# Altium PCB OSHChip_CMSIS_DAP_V1.0.PcbDoc
Units mil, origin at the board's own origin, x right, y up, seen from the top; angles counter-clockwise.
Board outline 1500 x 750 mil, 2 copper layers (Top Layer, Bottom Layer); 34 components, 42 nets, 120 pads, 41 vias.
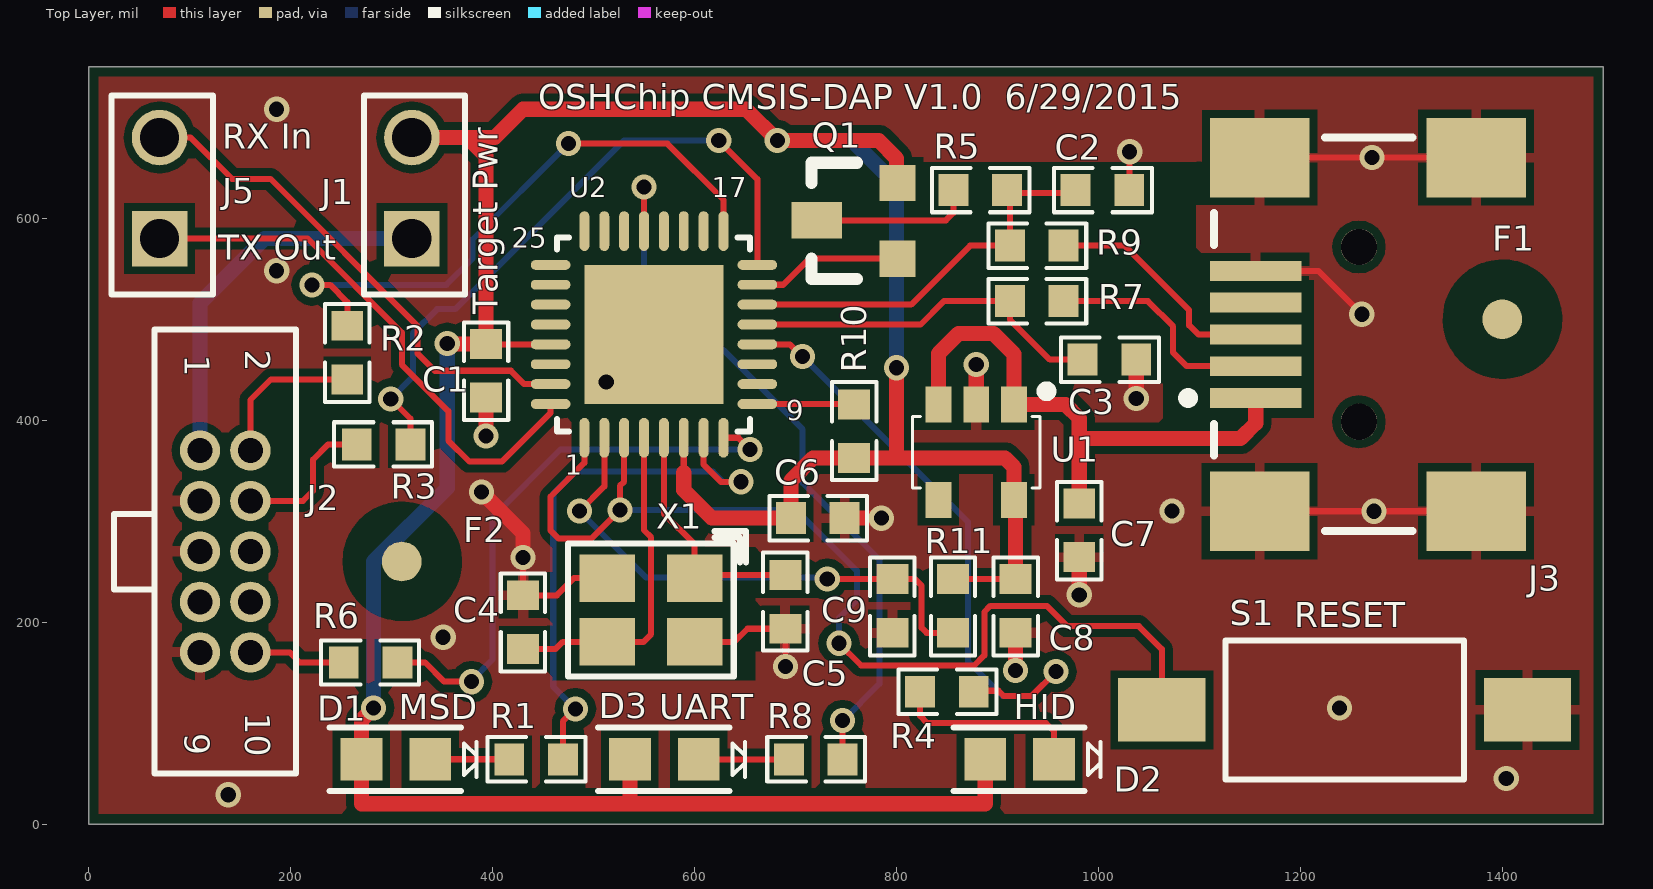
[diagram p0: Top Layer view]
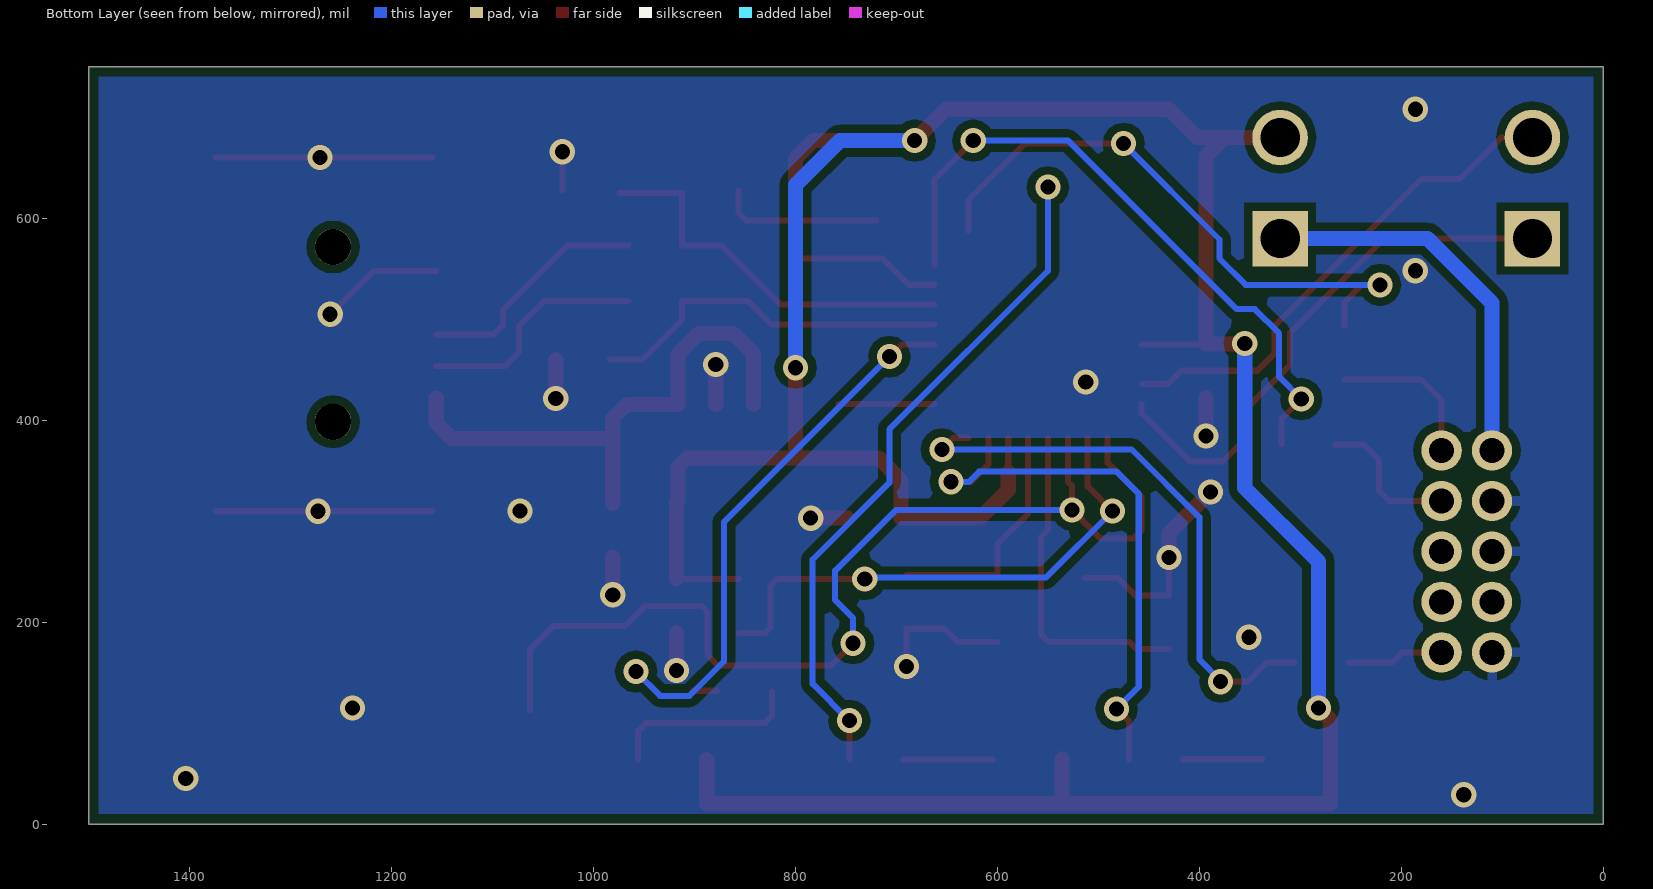
[diagram p1: Bottom Layer view, seen from below]
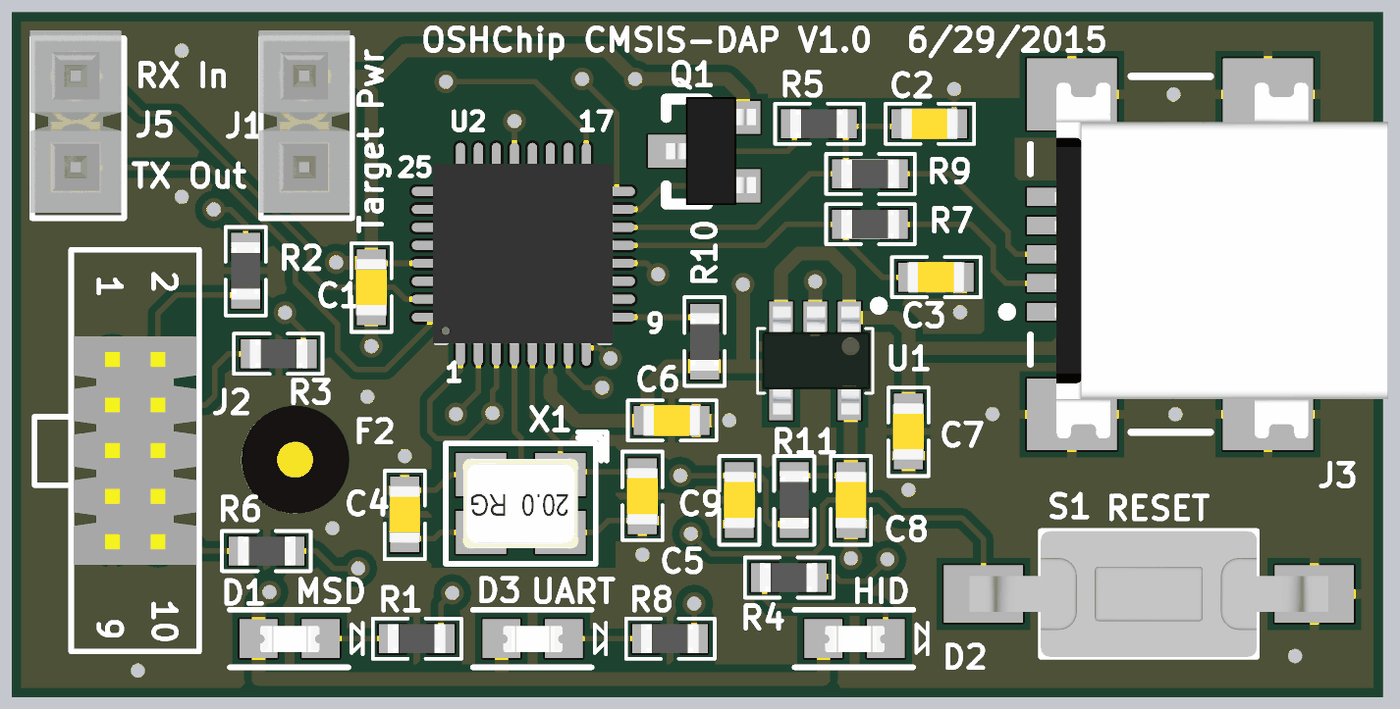
[diagram p2: 3D render of the assembled board from above, using the file's embedded part models]

## Layer stack, top to bottom
Top Layer: signal copper 1.4
Dielectric: dielectric 12.6, FR-4, Dk 4.8
Bottom Layer: signal copper 1.4

## Board outline
0,0 1500,0 1500,750 0,750

## Design rules (kind name [scope] priority, off if disabled: settings)
Clearance Polygon [(InNamedPolygon('Top_3.3V')) or (InNamedPolygon('Bottom_GND')) or (InNamedPolygon('Mid_Layer_1-GND')) or (InNamedPolygon('Mid_Layer_2-GND'))] p1: gap=8
Clearance [All] p2: gap=6.1
ComponentClearance [All] p1 off: gap=10 collisioncheckmode=3 verticalgap=10 showdistances=FALSE
FabricationTestPointUsage TestPointUsage [All] p1: valid=0 allowmultiple=FALSE
FabricationTestpoint Testpoint [All] p1: side=3 testpointundercomponent=TRUE minsize=40 maxsize=100 preferedsize=60 minholesize=0 maxholesize=40 preferedholesize=32 testpointgrid=1 allowsidetop=TRUE allowsidebottom=TRUE usegrid=TRUE gridtolerance=0.01
Height [All] p1 off: minheight=0 maxheight=1000 prefheight=500
HoleSize [All] p1: absolutevalues=TRUE maxlimit=160 minlimit=10 maxpercent=80.000 minpercent=20.000
HoleToHoleClearance [All] p1 off: gap=3 allowstackedmicrovias=FALSE
MinimumAnnularRing [All] p1 off: minimumring=5
MinimumSolderMaskSliver [All] p1: minsoldermaskwidth=3
PolygonConnect PolygonConnect_GND_Vias [isVia and innet(gnd)] p1: connectstyle=Direct reliefconductorwidth=10 reliefentries=4 polygonreliefangle="90 Angle"
PolygonConnect [All] p2: connectstyle=Relief reliefconductorwidth=10 reliefentries=4 polygonreliefangle="90 Angle"
RoutingCorners [All] p1: cornerstyle=45-Degree minsetback=20 maxsetback=20
RoutingVias [All] p1: holewidth=15 width=25 viastyle="Through Hole" minholewidth=15 minwidth=25 maxholewidth=100 maxwidth=120
SilkToSilkClearance [All] p1: silktosilkclearance=0
SilkscreenOverComponentPads [IsPad] p1: minsilkscreentomaskgap=3
SolderMaskExpansion [All] p1: expansion=2
Width [All] p1: maxlimit=100 minlimit=5 preferedwidth=6
18 further rules are at their usual default settings.

## Components (designator, comment, footprint, x,y, rotation, side; value= is the part's Value field where it differs from the comment)
C1 "0.1 uF 0603" "0603 Cap" 393.43,449 r90 top
C2 "18 pF 0603" "0603 Cap" 1004,628 r180 top
C3 "18 pF 0603" "0603 Cap" 1011,460 r180 top
C4 "18 pF 0603" "0603 Cap" 430,200 r90 top
C5 "18 pF 0603" "0603 Cap" 690,220 r270 top
C6 "0.1 uF 0603" "0603 Cap" 722,303 r180 top
C7 "1.0 uF 6.3V 0603" "0603 Cap" 981,291 r90 top
C8 "10uF 6.3V 0603" "0603 Cap" 918,216 r90 top
C9 "0.1 uF 0603" "0603 Cap" 796,216 r90 top
D1 "LED China Green 0603" 0603_LED 304,64 r0 top
D2 "LED China Green 0603" 0603_LED 922,64 r0 top
D3 "LED China Green 0603" 0603_LED 570,64 r0 top
F1 "F Fiducial" "FIDUCIAL DOT" 1400,500 r0 top
F2 "F Fiducial" "Fiducial Dot" 310,260 r0 top
J1 "HDR 1X2 0.1\"" HDR_2X1_2MM54 320,630 r180 top
J2 "2 x 5 SWD HDR" "HDR_2X5_1.27MM-THROUGH_HOLE_SWD NO SHROUD" 135,270 r270 top
J3 "Mini-B USB" USB_MINI-B 1265,485 r90 top
J5 "HDR 1X2 0.1\"" HDR_2X1_2MM54 70,630 r180 top
Q1 "BSS84 SOT-23" SOT23-123 761,598 r90 top
R1 "470R 0603" "0603 Res" 443,64 r180 top
R2 "470R 0603" "0603 Res" 256,467 r90 top
R3 "470R 0603" "0603 Res" 292,376 r0 top
R4 "470R 0603" "0603 Res" 850,131 r180 top
R5 "1.5K 0603" "0603 Res" 883,628 r180 top
R6 "470R 0603" "0603 Res" 279,160 r0 top
R7 "33R  0603" "0603 Res" 939,518 r180 top
R8 "470R 0603" "0603 Res" 720,64 r180 top
R9 "33R  0603" "0603 Res" 939,573 r180 top
R10 "10K  0603" "0603 Res" 758,389 r270 top
R11 "10K  0603" "0603 Res" 856,216 r90 top
S1 "Tact Switch FSMSM" "FSMSM Tact Switch" 1244,113 r180 top
U1 "TC1014-3.3VCT713" SOT23-5AL 879,368.29 r270 top
U2 "LPC11U35FHI33/501" "LPC11U35 QFN32 FOOTPRINT" 559.76,485 r90 top
X1 "12.000 MHz 2.5mmx3.2mm" "NX3225SA - High Density" 556.78,212 r180 top

## Footprints (in the part's own frame and the unit in brackets; to place one, negate y for a bottom-side part, rotate by r counter-clockwise, add the part's x,y. Pads: shape width x height; smd on the part's side, far side on the other; paste and mask are expansions set on the pad)
"0603 Cap" [mm] "Cap 0603  1608mm"
  rect 0.75x0.8 smd: 1(-0.675,0) 2(0.675,0)
  silkscreen extent -1.24,-0.56 1.22,0.56, body extent -0.8,-0.43 0.8,0.43, height 0.8
"0603 Res" [mm] "Res 0603  1608mm"
  rect 0.75x0.8 smd: 1(-0.675,0) 2(0.675,0)
  silkscreen extent -1.24,-0.56 1.22,0.56, body extent -0.8,-0.4 0.8,0.4, height 0.37
0603_LED [mm] "0603_LED_15/02/2007"
  rect 1.05x1.08 smd: 1(-0.865,0.004) 2(0.865,0.004)
  silkscreen extent -1.67,-0.8 2.03,0.8, body extent -0.82,-0.37 0.83,0.35, height 0.68
"FIDUCIAL DOT" [mm] "Fiducial Dot 1mm dia copper, no paste, mask 3mm dia"
  round 1 smd paste-0.533 mask+1: 0(0,0)
  Top Layer pour cut-out: -0.089,1.5 -0.003,1.503 0.084,1.501 0.187,1.492 0.238,1.485 0.287,1.476 0.388,1.454 0.491,1.423 0.582,1.388 0.626,1.369 0.668,1.349 0.759,1.301 0.846,1.247 0.898,1.21 0.948,1.171 1.024,1.107 1.101,1.032 1.176,0.943 1.253,0.841 1.307,0.755 1.354,0.663 1.381,0.607 1.403,0.555 1.429,0.482 1.454,0.407 1.468,0.345 1.481,0.282 1.491,0.227 1.498,0.174 1.507,0.079 1.508,-0.015 1.502,-0.129 1.494,-0.203 1.481,-0.277 1.465,-0.354 1.429,-0.479 1.395,-0.569 1.354,-0.658 1.312,-0.738 1.253,-0.835 1.176,-0.937 1.113,-1.012 1.062,-1.064 1.018,-1.107 0.97,-1.148 0.909,-1.196 0.846,-1.242 0.759,-1.296 0.668,-1.343 0.599,-1.376 0.489,-1.417 0.389,-1.447 0.285,-1.472 0.203,-1.485 0.109,-1.494 0.011,-1.496 -0.068,-1.496 -0.172,-1.485 -0.271,-1.47 -0.371,-1.448 -0.475,-1.42 -0.566,-1.384 -0.652,-1.343 -0.744,-1.295 -0.83,-1.242 -0.932,-1.166 -0.984,-1.124 -1.06,-1.051 -1.133,-0.971 -1.187,-0.904 -1.237,-0.835 -1.313,-0.708 -1.364,-0.607 -1.414,-0.48 -1.465,-0.277 -1.491,-0.048 -1.474,0.232 -1.46,0.31 -1.451,0.349 -1.442,0.387 -1.416,0.475 -1.401,0.517 -1.384,0.56 -1.353,0.633 -1.319,0.703 -1.291,0.753 -1.264,0.797 -1.236,0.841 -1.2,0.893 -1.161,0.943 -1.11,1.003 -1.056,1.061 -0.996,1.118 -0.932,1.171 -0.878,1.213 -0.822,1.253 -0.764,1.289 -0.703,1.324 -0.617,1.366 -0.528,1.404 -0.466,1.426 -0.402,1.446 -0.337,1.463 -0.271,1.476 -0.185,1.491
"Fiducial Dot" [mm] "Fiducial Dot 1mm dia copper, no paste, mask 3mm dia"
  round 1 smd paste-0.533 mask+1: 0(0,0)
  Top Layer pour cut-out: -0.089,1.5 -0.003,1.503 0.084,1.501 0.187,1.492 0.238,1.485 0.287,1.476 0.388,1.454 0.491,1.423 0.582,1.388 0.626,1.369 0.668,1.349 0.759,1.301 0.846,1.247 0.898,1.21 0.948,1.171 1.024,1.107 1.101,1.032 1.176,0.943 1.253,0.841 1.307,0.755 1.354,0.663 1.381,0.607 1.403,0.555 1.429,0.482 1.454,0.407 1.468,0.345 1.481,0.282 1.491,0.227 1.498,0.174 1.507,0.079 1.508,-0.015 1.502,-0.129 1.494,-0.203 1.481,-0.277 1.465,-0.354 1.429,-0.479 1.395,-0.569 1.354,-0.658 1.312,-0.738 1.253,-0.835 1.176,-0.937 1.113,-1.012 1.062,-1.064 1.018,-1.107 0.97,-1.148 0.909,-1.196 0.846,-1.242 0.759,-1.296 0.668,-1.343 0.599,-1.376 0.489,-1.417 0.389,-1.447 0.285,-1.472 0.203,-1.485 0.109,-1.494 0.011,-1.496 -0.068,-1.496 -0.172,-1.485 -0.271,-1.47 -0.371,-1.448 -0.475,-1.42 -0.566,-1.384 -0.652,-1.343 -0.744,-1.295 -0.83,-1.242 -0.932,-1.166 -0.984,-1.124 -1.06,-1.051 -1.133,-0.971 -1.187,-0.904 -1.237,-0.835 -1.313,-0.708 -1.364,-0.607 -1.414,-0.48 -1.465,-0.277 -1.491,-0.048 -1.474,0.232 -1.46,0.31 -1.451,0.349 -1.442,0.387 -1.416,0.475 -1.401,0.517 -1.384,0.56 -1.353,0.633 -1.319,0.703 -1.291,0.753 -1.264,0.797 -1.236,0.841 -1.2,0.893 -1.161,0.943 -1.11,1.003 -1.056,1.061 -0.996,1.118 -0.932,1.171 -0.878,1.213 -0.822,1.253 -0.764,1.289 -0.703,1.324 -0.617,1.366 -0.528,1.404 -0.466,1.426 -0.402,1.446 -0.337,1.463 -0.271,1.476 -0.185,1.491
"FSMSM Tact Switch" [mm] "FSMSM Tact Switch 6 x 3.5 mm, SMD"
  rect 2.2x1.6 smd: 1(-4.6,0) 2(4.6,0)
  silkscreen extent -3,-1.75 3,1.75, body extent -4.98,-1.75 4.98,1.75, height 4.4
HDR_2X1_2MM54 [mil] "HDR_2X1_2MM54_15/02/2007"
  rect 55x55 hole 39: 1(0,50)
  round 55 hole 39: 2(0,-50)
  silkscreen extent -52,-92 48,105, body extent -50,-100 50,100, height 330
"HDR_2X5_1.27MM-THROUGH_HOLE_SWD NO SHROUD" [mil] "1.27mm Through_Hole, FTSH 102 series, \"SWD\" version J-LINK Lite, No shroud"
  round 40 hole 25: 1(-100,-25) 2(-100,25) 3(-50,-25) 4(-50,25) 5(0,-25) 6(0,25) 7(50,-25) 8(50,25) 9(100,-25) 10(100,25)
  silkscreen extent -220,-70 220,70, body extent -125,-68 125,68, height 219
"LPC11U35 QFN32 FOOTPRINT" [mm] "QFN, 32-Leads, Body 5.0x5.0mm (max), Pitch 0.50mm, IPC Low Density"
  oval 1x0.25 smd mask+0.075: 1(-2.6,1.75) 2(-2.6,1.25) 3(-2.6,0.75) 4(-2.6,0.25) 5(-2.6,-0.25) 6(-2.6,-0.75) 7(-2.6,-1.25) 8(-2.6,-1.75) 17(2.6,-1.75) 18(2.6,-1.25) 19(2.6,-0.75) 20(2.6,-0.25) 21(2.6,0.25) 22(2.6,0.75) 23(2.6,1.25) 24(2.6,1.75)
  oval 0.25x1 smd mask+0.075: 9(-1.75,-2.6) 10(-1.25,-2.6) 11(-0.75,-2.6) 12(-0.25,-2.6) 13(0.25,-2.6) 14(0.75,-2.6) 15(1.25,-2.6) 16(1.75,-2.6) 25(1.75,2.6) 26(1.25,2.6) 27(0.75,2.6) 28(0.25,2.6) 29(-0.25,2.6) 30(-0.75,2.6) 31(-1.25,2.6) 32(-1.75,2.6)
  rect 3.5x3.5 smd paste-2: 33(0,0)
  silkscreen extent -2.44,-2.41 2.44,2.44, body extent -2.5,-2.5 2.52,2.52, height 0.8
"NX3225SA - High Density" [mm] "NDK NX3225SA SMT crystals"
  rect 1.4x1.2 smd: 1(-1.1,-0.8) 2(1.1,-0.8) 3(1.1,0.8) 4(-1.1,0.8)
  silkscreen extent -2.39,-1.98 2.08,1.68, body extent -1.61,-1.25 1.61,1.25, height 0.83
SOT23-5AL [mm] "SOT23, 5-Leads, Body 2.9x1.6mm, Pitch 0.95mm, Lead Span 2.8mm, IPC High Density"
  rect 0.9x0.65 smd: 1(-1.2,0.95) 2(-1.2,0) 3(-1.2,-0.95) 4(1.2,-0.95) 5(1.2,0.95)
  silkscreen extent -1.66,-1.6 0.9,1.89, body extent -1.51,-1.47 1.49,1.53, height 1.3
SOT23-123 [mil]
  rect 36x36 smd: 1(-38,-40) 2(37,-40)
  rect 36x50 smd: 3(0,40)
  silkscreen extent -58,0 57,45, body extent -59,-53 59,45, height 43
USB_MINI-B [mm] "Connector; USB2.0, Type B, SM; 5 Position; Right Angle"
  rect 0.5x2.3 smd: 1(-1.6,2.774) 2(-0.8,2.774) 3(0,2.774) 4(0.8,2.774) 5(1.6,2.774)
  rect 2x2.5 smd: Case(-4.45,-2.776) Case(-4.45,2.674) Case(4.45,-2.776) Case(4.45,2.674)
  round 0.914 hole 0.914 unplated: MH1(2.2,0.174) MH2(-2.2,0.174)
  silkscreen extent -4.95,-1.18 4.95,4.6, body extent -5.13,-6.1 4.78,3.15, height 3.93

## Part data
C1 C6 C9: library part "C 0.1 uF 16V 10% X7R 0603", "0.1 uF 16V 10% X7R 0603"
C2 C3 C4 C5: library part "C 18 pF 0603  50V  NP0  5%", "Capacitor 18 pF 0603  50V  NP0  5%"
C7: library part "C 1.0 uF 6.3V 10% X7R 0603", "Capacitor 1.0 uF 6.3V 10% X7R 0603"
C8: library part "C 10uF 0603 6.3V 20% X5R", "Capacitor 10uF 0603 6.3V 20% X5R"
D1 D2 D3: library part "D LED LED_China_Green_0603", "LED Green 0603"
F1 F2: "Fiducial"
J1 J5: library part "J Header 1X2, 2.54 mm pitch", "Header 1X2, 2.54 mm pitch"
J2: library part "J Header 5X2 J-Link Lite   FTSH-105-01-L-D through hole, No Key, No shroud", "FTSH-105-01-L-D through hole, No Key, No shroud"
J3: library part "J Mini-B USB 690-005-299-043 With alignment pins", "USB 2.0, Right Angle, SMT, B Type, Receptacle, 5 Position, Black"
Q1: library part "Q BSS84", "P-channel Enhancement Mode Vertical D-MOSFET"
R1 R2 R3 R4 R6 R8: library part "R 470R 0603 1/10 W 1%", "Resistor 470R 0603 1/10 W 1%"
R5: library part "R 1.5K 0603 1/10 W 1%", "Resistor 1.5K 0402 1/10 W 1%"
R7 R9: library part "R 33R 0603 1/10 W 1%", "Resistor 33R 0603 1/10 W 1%"
R10 R11: library part "R 10K 0603 1/10 W 1%", "Resistor 10K 0603 1/10 W 1%"
S1: library part "S FSMSM 6 x 3.5 mm   Tact Switch", "6 x 3.5 mm   Tact Switch"
U1: library part "U TC1014-3.3VCT713", "3.3V 50mA LDO"
U2: "LPC11U35FHI33/501 ARM M0 64KB FLASH 33HVQFN"
X1: library part "X 12MHz, 2.5mmx3.2mm 30ppm 8 pF", "12MHz"

## Via types
v1: diameter 25, hole 15, Top Layer to Bottom Layer, tented both sides, 41 vias

## Nets (pads, with @x,y where several pads share a name; then routed paths per layer and width w, separated by ;. In a path a pad name is that pad's centre, name@x,y a point inside that pad or via, vN(x,y) a via of type N, cw(c..) or ccw(c..) an arc to the next point about the centre after c; other vN are vias at no path point)
3.3V: C1.2 C6.2 C8.2 D1.1 D2.1 D3.1 J1.2 Q1.2 R10.2 R11.2 U1.5 U2.6 U2.29 | length 3066.3
  Top Layer w6: C1.2@393.84,475.16 U2.29 ; 589.29,348 U2.6 ; R11.2 C8.2
  Top Layer w15: v1(282,115) 269.93,102.93 D1.1 270,64.08 270,20 535.93,20 ; J1.2 375,680 ; v1@355,475.57 C1.2 393.43,661.57 375,680 ; D3.1 535.93,20 ; 589.29,348 589.29,330.71 617,303 C6.2 695.43,340.43 717.43,362.43 R10.2 800,362.43 ; v1(800,452.02) 800,362.43 ; Q1.2@800,635 800,659.41 782.41,677 v1(682,677) 651,708 430,708 402,680 375,680 ; 888,20 535.93,20 ; 888,20.21 D2.1@888,64 ; U1.5 916.4,353.6 907.57,362.43 800,362.43 ; C8.2 U1.5@918,319.45
  Bottom Layer w15: v1(282,115) 282,260 355,333 v1(355,476) ; v1(682,677) 756,677 800,633 v1(800,452.02)
GND: C1.1 C2.1 C3.1 C4.2 C5.2 C6.1 C7.1 C8.1 C9.1 J2.3 J2.5 J2.9 J3.5 J3.Case S1.1 U1.2 U2.33 X1.2 X1.4 | length 1160.6
  Top Layer w6: v1(430,264) C4.2 463.57,226.57 480.5,243.5 X1.2 ; X1.4 639.5,180.5 652.43,193.43 C5.2 v1(690,156) ; C2.1@1031,627.57 v1(1031,666) ; J3.5@1155.94,547.99 1218.01,547.99 v1(1261,505) ; J3.Case@1159.88,309.8 v1(1273,309.8) J3.Case@1374.45,309.8 ; J3.Case@1159.88,660.2 v1(1271,660.2) J3.Case@1374.45,660.2
  Top Layer w15: v1(389,329) 430,288 v1(430,264) ; v1(393.43,384.43) C1.1 ; C6.1 v1(785,303) ; U1.2 v1(879,455.29) ; v1(918,152) C8.1 ; v1(981,227) C7.1 ; v1(1037.57,421.43) C3.1
  other v1: 138,29 1404,45 1239,115 350.95,185 1073,310 512.52,437.75 186,548 186,708
IF_RESET: C9.2 R11.1 U2.2 | length 526.6
  Top Layer w6: v1(486,310) 510.55,334.55 U2.2 ; v1(731.43,242.57) C9.2 818.54,242.57 825,236.11 825,194.43 830,189.43 R11.1
  Bottom Layer w6: v1(486,310) 552,244 v1@731.43,244
LED_HID: R4.1 U2.12 | length 623.3
  Top Layer w6: U2.12 694.44,475.16 706.6,463 v1(707,463) ; R4.1@877.57,132 901,132 906,127 934,127 v1(958,151)
  Bottom Layer w6: v1(707,463) 871,299 871,161 905,127 934,127 v1(958,151)
LED_MSD: R1.1 U2.7 | length 547.2
  Top Layer w6: R1.1 469.57,101.57 v1(482,114) ; U2.7 608.98,356.02 626,339 v1(646,339)
  Bottom Layer w6: v1(482,114) 460,136 460,327 482,349 618,349 628,339 v1(646,339)
LED_UART: R8.1 U2.21 | length 722.1
  Top Layer w6: U2.21 v1(549.92,630.92) ; R8.1 v1(746.57,102.43)
  Bottom Layer w6: v1(549.92,630.92) 549.92,548.08 707,391 707,338 783,262 783,138.85 v1(746.57,102.43)
NetC4_1: C4.1 U2.4 X1.3 | length 330.6
  Top Layer w6: C4.1 462.43,173.43 469.5,180.5 X1.3 549.5,180.5 557,188 557,284 549.92,291.08 U2.4
NetC5_1: C5.1 U2.5 X1.1 | length 243
  Top Layer w6: U2.5 569.61,307.39 600.08,276.92 X1.1 603.16,246.57 C5.1
NetD1_2: D1.2 R1.2 | length 78.2
  Top Layer w6: D1.2 R1.2@416.28,64.15
NetD2_2: D2.2 R4.2 | length 190.6
  Top Layer w6: R4.2 823.43,107.15 830.57,100 948,100 956.04,91.96 D2.2
NetD3_2: D3.2 R8.2 | length 89.2
  Top Layer w6: D3.2@604.19,64 R8.2
NetJ1_1: J1.1 J2.1 | length 382.5
  Bottom Layer w15: J2.1 110,516 174,580 J1.1
NetJ2_2: J2.2 R2.1 | length 154.5
  Top Layer w6: J2.2 160,420 180.43,440.43 R2.1
NetJ2_4: J2.4 R3.1 | length 146.8
  Top Layer w6: J2.4 212,320 222,330 222,361 237,376 R3.1
NetJ2_10: J2.10 R6.1 | length 96.6
  Top Layer w6: J2.10 199,170 209,160 R6.1
NetJ3_2: J3.2 R7.1 | length 232.3
  Top Layer w6: R7.1 1049,518 1074,493 1074,467 1087.5,453.5 J3.2@1155.94,453.5
NetJ3_3: J3.3 R9.1 | length 235.6
  Top Layer w6: R9.1 1026,573 1090,509 1090,494 1099,485 J3.3@1155.94,485
NetQ1_3: Q1.3 R5.2 | length 162.1
  Top Layer w6: Q1.3@720,598 849,598 856.43,605.43 R5.2
PIO0_4: U2.10
PIO0_5: U2.11
PIO0_9: U2.18
PIO0_10: U2.19
PIO0_12: U2.22
PIO0_13: U2.23
PIO0_14: U2.24
PIO0_15: U2.25
PIO0_16: U2.26
PIO0_17: U2.30
PIO0_22: U2.20
PIO0_23: U2.27
PIO1_15: U2.28
RESET: S1.2 U2.1 U2.3 | length 1057.9
  Top Layer w6: U2.1 490.87,357.87 457.4,324.4 457.4,290.6 465,283 498,283 v1(526,311) 526,335 530.24,339.24 U2.3 ; v1(743,179) 765,157 877,157 887,167 887,210 893,216 949,216 969,196 1040,196 1062.9,173.1 S1.2
  Bottom Layer w6: v1(526,311) 700.57,311 760.69,250.88 760.69,221.69 743,204 v1(743,179)
RX_IN: J5.2 U2.31 | length 504.5
  Top Layer w6: J5.2 100.86,680 141.94,638.92 180,638.92 325.72,493.2 325.72,466 342.72,449 418,449 431.21,435.79 U2.31
TGT_NRESET: R6.2 U2.8 | length 566.6
  Top Layer w6: R6.2 333,160 352,141 v1(379,141) ; U2.8 643.36,382.64 v1(655,371)
  Bottom Layer w6: v1@378.5,141.5 400,163 400,304 467,371 v1(655,371)
TGT_SWCLK: R3.2 U2.16 | length 648.2
  Top Layer w6: v1(299,421) 318.57,401.43 R3.2 ; v1(624,677) 662.13,638.87 U2.16
  Bottom Layer w6: v1(299,421) 321,443 321,486 345,510 363,510 530,677 v1(624,677)
TGT_SWDIO: R2.2 U2.17 | length 596.3
  Top Layer w6: v1(221,534) 239,534 256,517 R2.2 ; v1(475,674) 573,674 628.66,618.34 U2.17
  Bottom Layer w6: v1(221,534) 354,534 380,560 380,579 v1(475,674)
TX_OUT: J5.1 U2.32 | length 543.3
  Top Layer w6: J5.1 216.72,580 310,486.72 310,455.14 356.15,408.99 356.15,379.85 377,359 409,359 457.4,407.4 U2.32
USB_D_N: C3.2 R7.2 U2.13 | length 366.7
  Top Layer w6: U2.13 823.84,494.84 847,518 R7.2 912.43,499.57 952,460 C3.2
USB_D_P: C2.2 R5.1 R9.2 U2.14 | length 388.8
  Top Layer w6: U2.14 814.53,514.53 873,573 R9.2 912.43,625.15 C2.2@974.57,625.15
USB_SCON: Q1.1 U2.15 | length 148.6
  Top Layer w6: U2.15 687.64,534.21 713.43,560 Q1.1@800,560
V_USB: C7.2 J3.1 U1.1 U1.3 | length 552.8
  Top Layer w15: U1.3 841.6,466 861.6,486 896,486 916.4,465.6 U1.1 967.47,415.54 981,402 C7.2 ; 981,382 1140.88,382 1155.94,397.06 J3.1@1155.94,422.01
VBUS_SENSE: R10.1 U2.9 | length 95.3
  Top Layer w6: U2.9 R10.1@757.47,416.1
pads on no net: F1.0 F2.0 J2.6 J2.7 J2.8 J3.4 J3.MH1 J3.MH2 U1.4

## Polygon pours and split planes (outlines as drawn)
GND on Bottom Layer "Bottom_GND" (solid, pour order 4): 10,10 1490,10 1490,740 10,740 10,10
GND on Top Layer "Top_3.3V" (solid, remove dead copper, pour order 3): 10,10 1490,10 1490,740 10,740 10,10

## Other copper
Top Layer:
  pour cut-out: 1064,539 1214,539 1214,402 1064,402
  pour cut-out: 813.53,656 1097,656 1097,436.25 813.53,436.25
  pour cut-out: 459.18,274.85 660.35,274.85 660.35,141.89 459.18,141.89

## Silkscreen, mask and mechanical layers (free items; w line width, h text height)
Top Overlay:
  lines w6: 65,232.11 25,232.11 25,307.11 65,307.11
  text "OSHChip CMSIS-DAP V1.0  6/29/2015" at 445,708 h25
  text "RX In" at 132,669 h25
  text "TX Out" at 128,559 h25
  text "Target Pwr" at 405,505.03 h25 r90
  text "RESET" at 1194,195 h25
  text "MSD" at 307,104 h25
  text "UART" at 565,104 h25
  text "HID" at 916,104 h25
Mechanical 29 OSHStencil Border:
  lines w6: 1,1 1499,1 1499,749 1,749 1,1
Mechanical 31 Board Outline:
  the board outline again, w6
Mechanical 32 Top Engrave:
  text "OSHChip CMSIS-DAP" at 20,1250 h150
  text "V1.0   6/8/2015" at 30,1030 h150

## Dimensions
0,800 to 1500,800 on Mechanical 16
1550,0 to 1550,750 on Mechanical 16

## Text inside footprints (layer, text, board x,y; h text height)
J2: Top Overlay "2" at 155,470 h25 r270; Top Overlay "1" at 95,465 h25 r270; Top Overlay "9" at 95,90 h25 r270; Top Overlay "10" at 155,110 h25 r270
U2: Top Overlay "1" at 471.18,346.22 h20; Top Overlay "9" at 691,400 h20; Top Overlay "17" at 617,621 h20; Top Overlay "25" at 419,570.78 h20